# Altium PCB PCB1.PcbDoc
Units mm, origin at the board's own origin, x right, y up, seen from the top; angles counter-clockwise.
Board outline 100 x 100 mm, 2 copper layers (Top Layer, Bottom Layer); 32 components, 22 nets, 87 pads, 0 vias.
Unrouted connection lines stored in the file: 6.
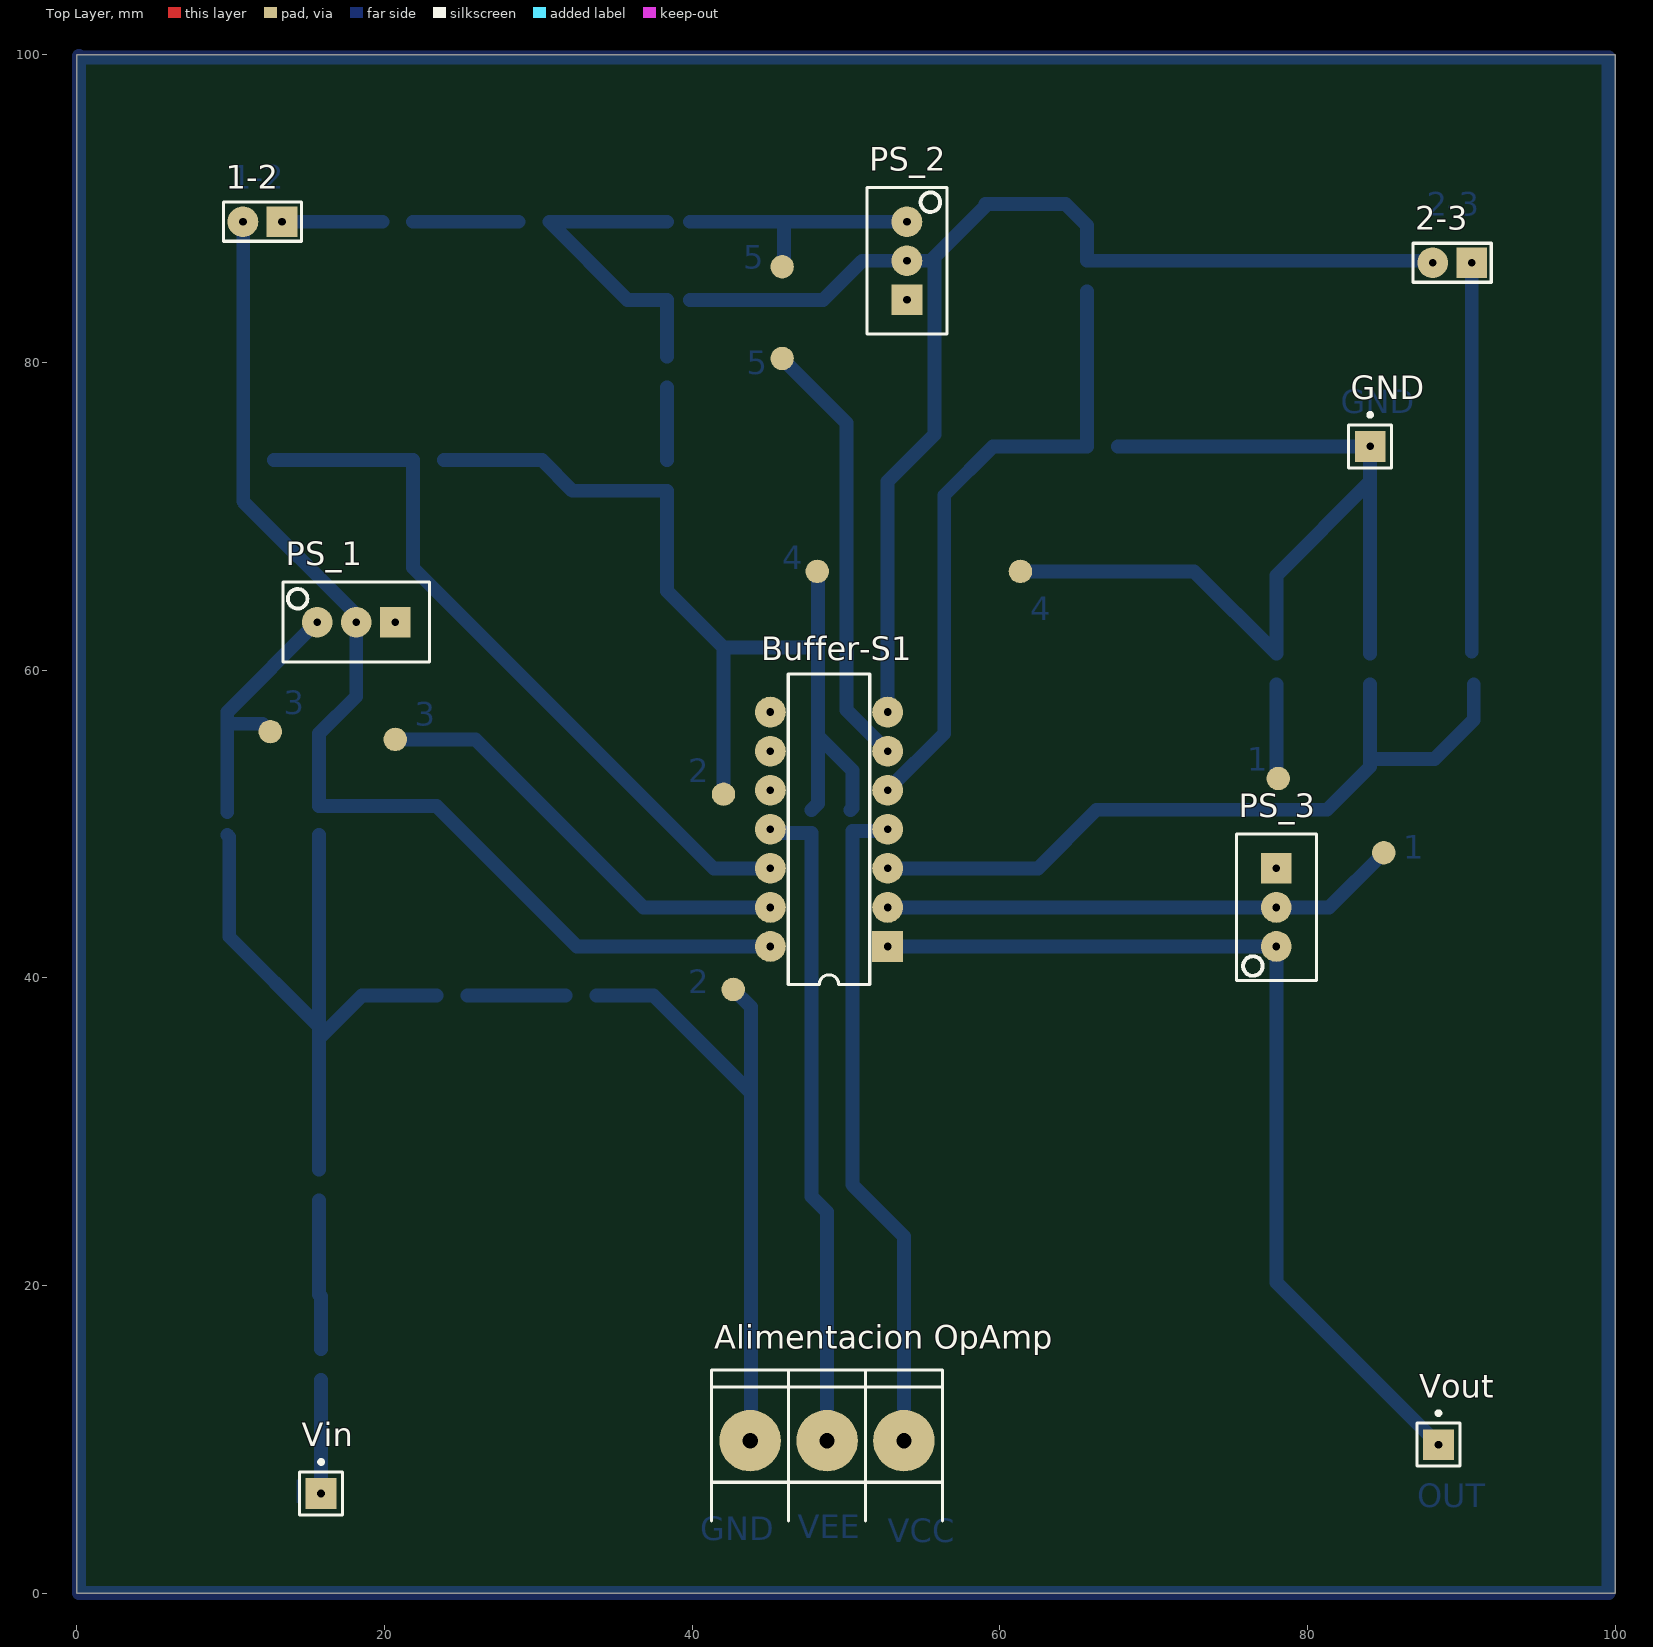
[diagram p0: Top Layer view]
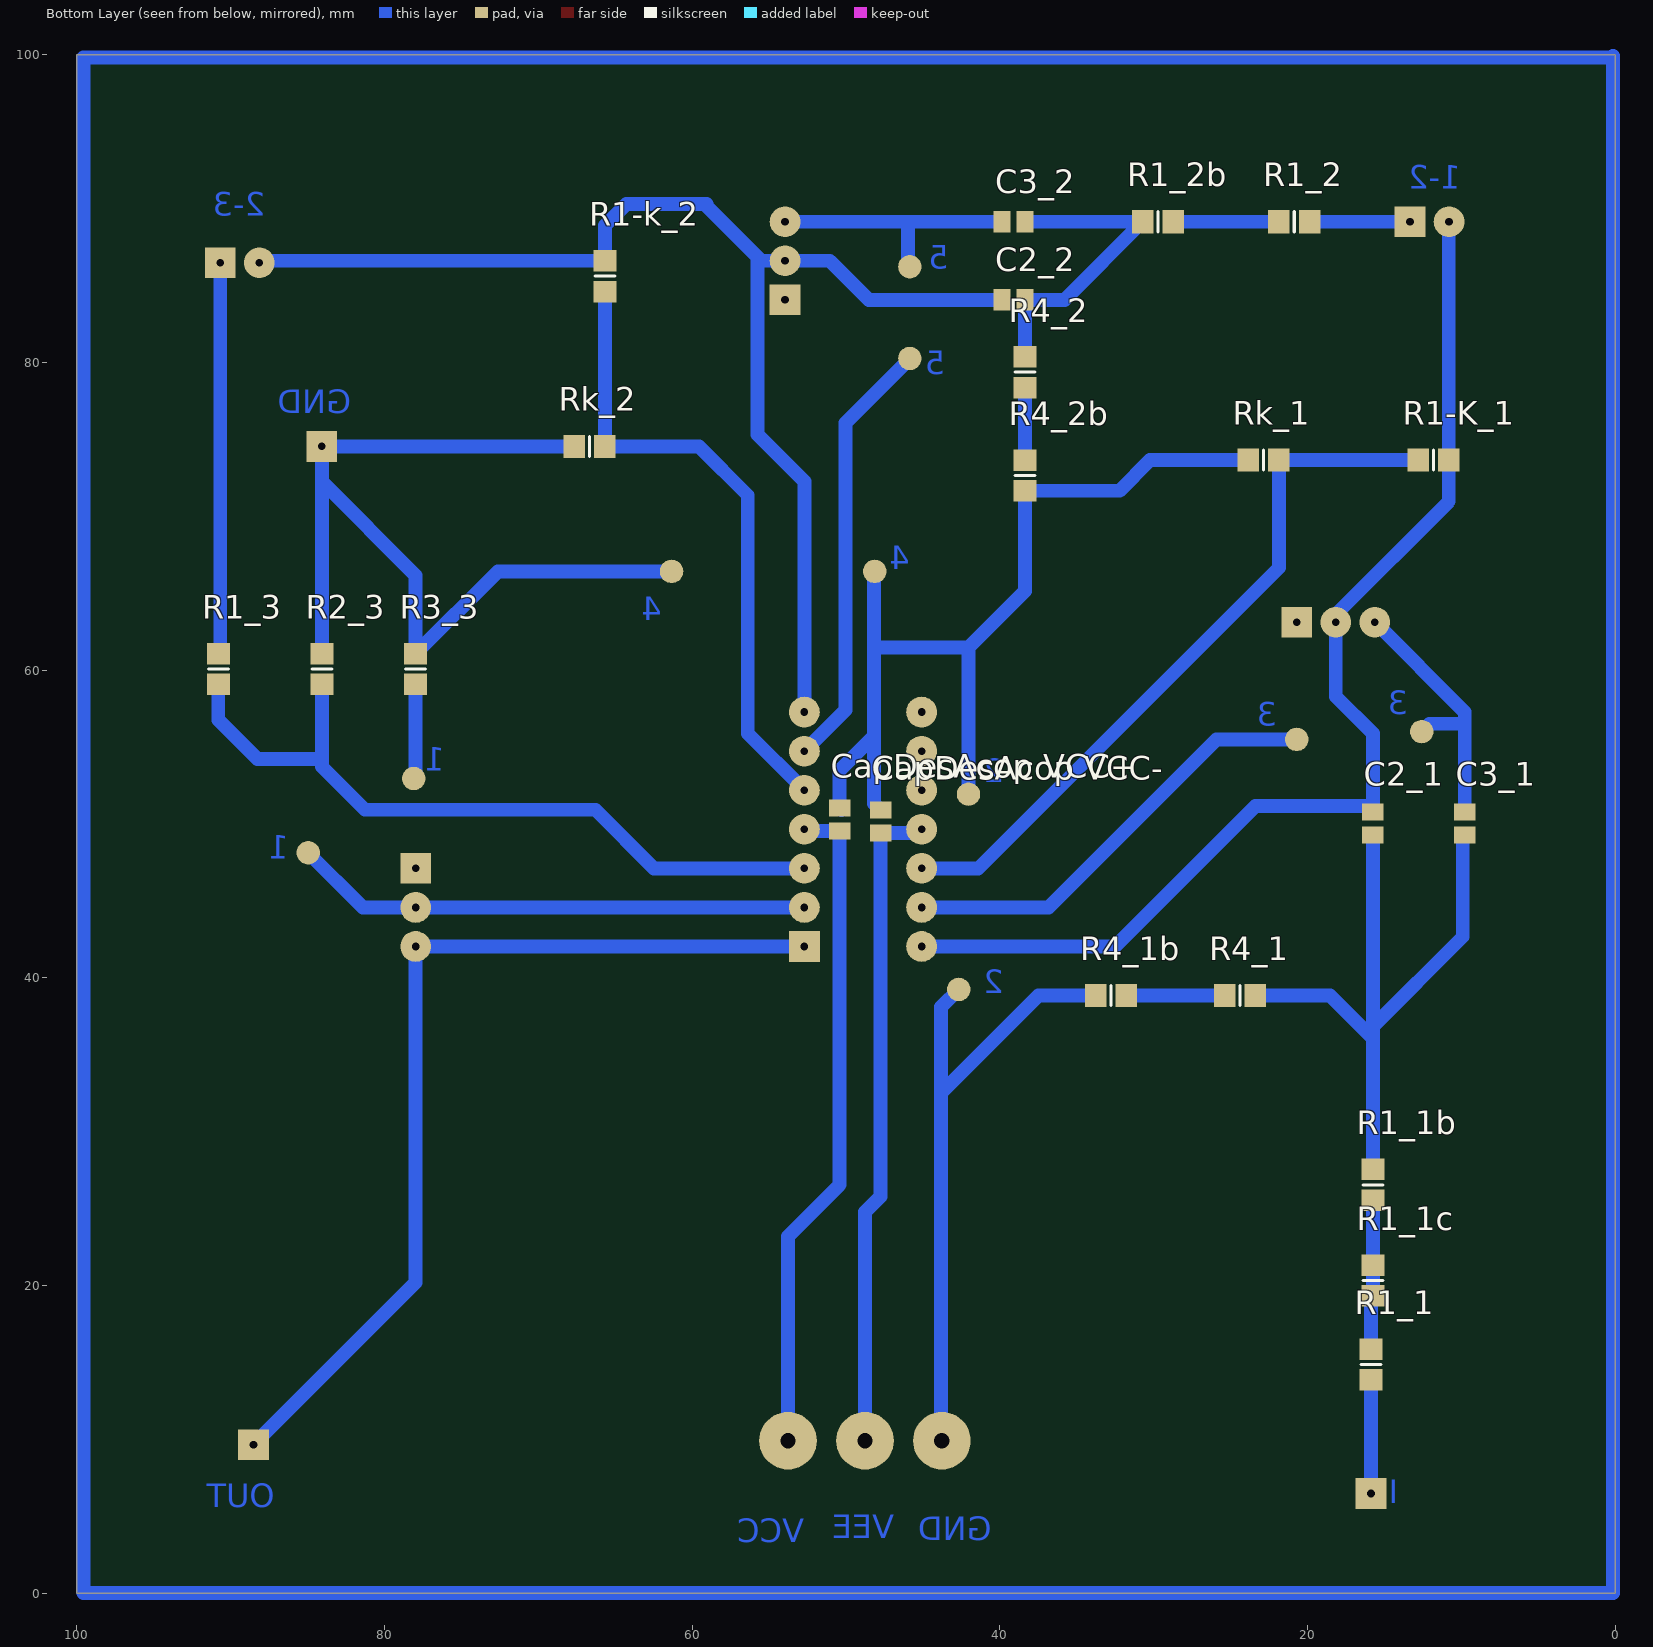
[diagram p1: Bottom Layer view, seen from below]
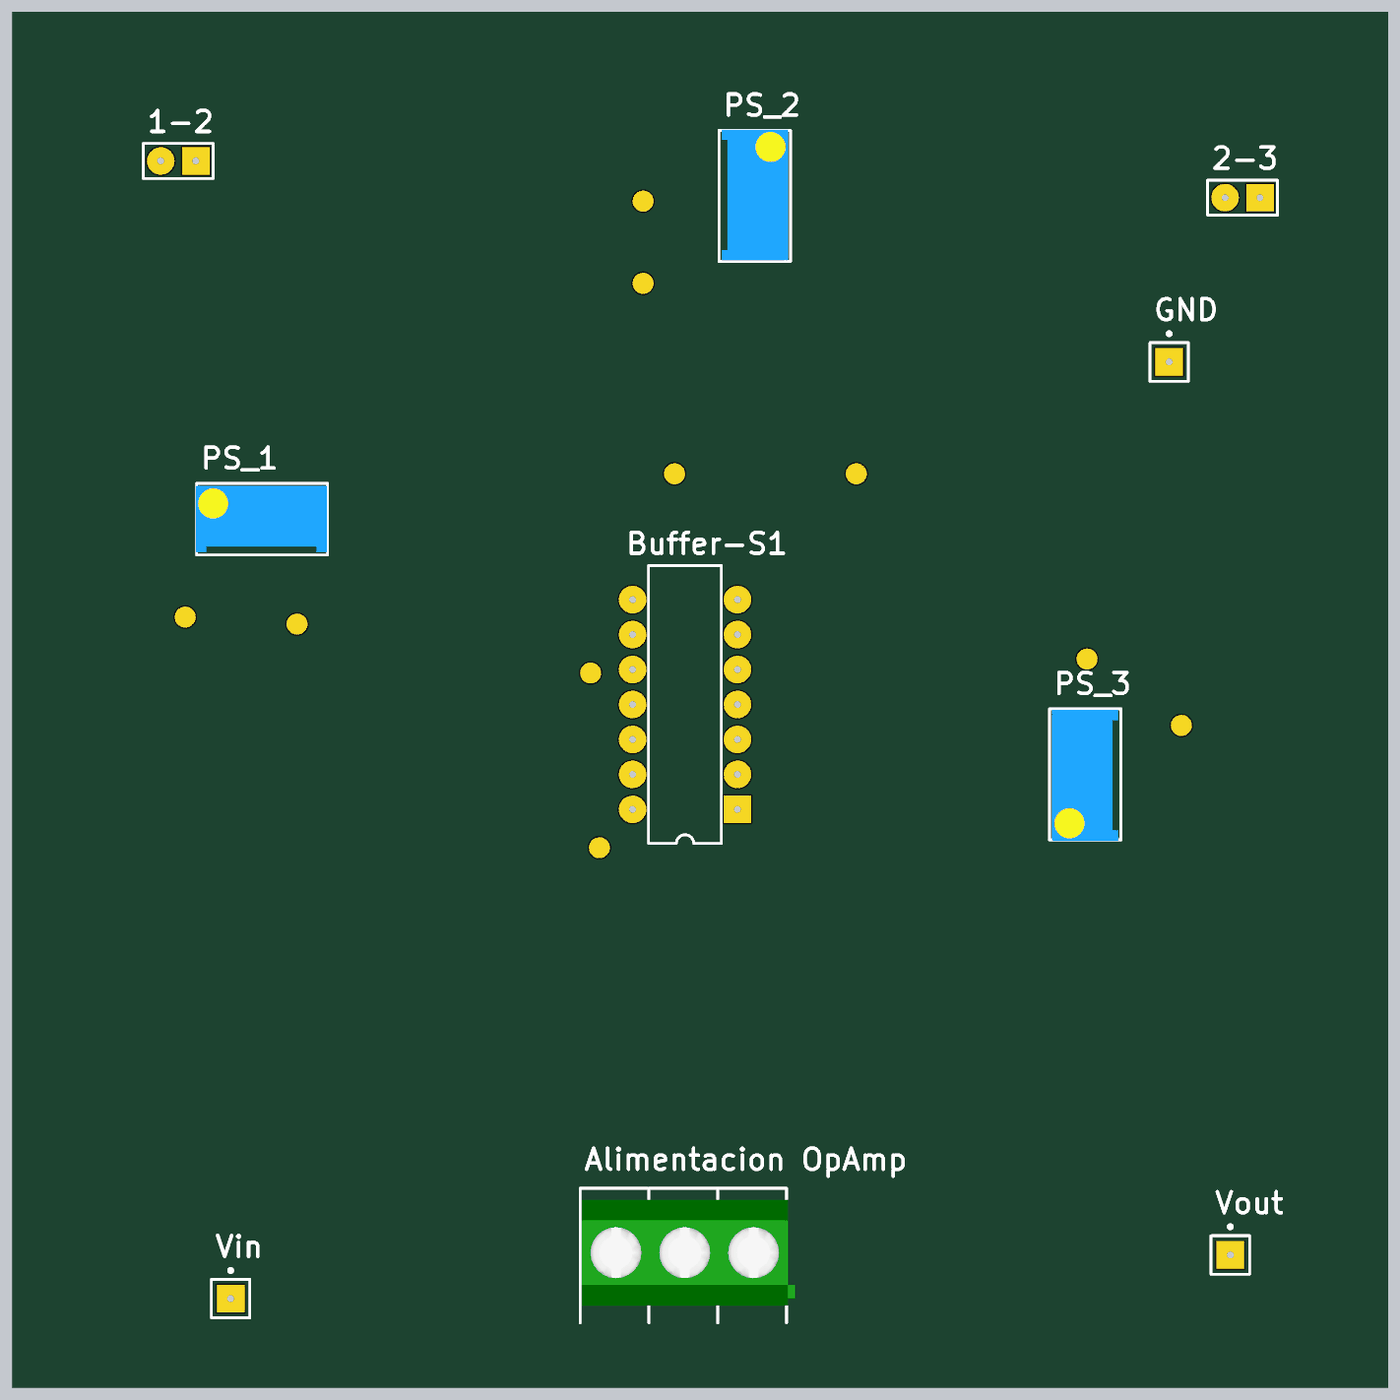
[diagram p2: 3D render of the assembled board from above, using the file's embedded part models]

## Layer stack, top to bottom
Top Solder: solder mask 0.0102, Solder Resist, Dk 3.5
Top Layer: signal copper 0.0356
Dielectric 1: dielectric 0.32, FR-4, Dk 4.8
Bottom Layer: signal copper 0.0356
Bottom Solder: solder mask 0.0102, Solder Resist, Dk 3.5

## Board outline
0,0 100,0 100,100 0,100 0,0

## Design rules (kind name [scope] priority, off if disabled: settings)
Clearance [All] p1: gap=0.254
PolygonConnect [All] p1: connectstyle=Relief reliefconductorwidth=0.254 reliefentries=4 polygonreliefangle="90 Angle" airgapwidth=0.254
RoutingVias [All] p1: holewidth=0.711 width=1.27 viastyle="Through Hole" minholewidth=0.711 minwidth=1.27 maxholewidth=0.711 maxwidth=1.27
SolderMaskExpansion [All] p1: expansion=0.102
UnpouredPolygon [All] p1: allowunpoured=FALSE
Width [All] p1: maxlimit=0.9 minlimit=0.75 preferedwidth=0.75
29 further rules are at their usual default settings.

## Components (designator, comment, footprint, x,y, rotation, side; value= is the part's Value field where it differs from the comment)
1-2 "Header 2" HDR1X2 13.335,89.154 r180 top
2-3 "Header 2" HDR1X2 90.678,86.487 r180 top
"Alimentacion OpAmp" "BORNERA 3" BORNERA3 48.768,9.906 r270 top
Buffer-S1 "TL084J" J014 48.895,49.657 r90 top
C2_1 "Cap Semi" C0805 15.748,50.038 r270 bottom
C2_2 "Cap Semi" C0805 39.116,84.074 r180 bottom
C3_1 "Cap Semi" C0805 9.779,50.038 r270 bottom
C3_2 "Cap Semi" C0805 39.116,89.154 r180 bottom
"CapDesAcop VCC+" "Cap Semi" C0805 50.419,50.292 r270 bottom
"CapDesAcop VCC-" "Cap Semi" C0805 47.752,50.165 r270 bottom
GND "Socket" PIN1 84.074,74.549 r0 top
PS_1 "PRESET 25K" "PRESET V" 18.161,63.119 r180 top
PS_2 "PRESET 25K" "PRESET V" 53.963,86.614 r90 top
PS_3 "PRESET 25K" "PRESET V" 77.978,44.577 r270 top
R1-K_1 "1k" 6-0805_M 11.811,73.66 r180 bottom
R1-k_2 "Res3" 6-0805_M 65.659,85.614 r90 bottom
R1_1 "Res3" 6-0805_M 15.875,14.859 r90 bottom
R1_1b "Res3" 6-0805_M 15.748,26.543 r90 bottom
R1_1c "Res3" 6-0805_M 15.748,20.32 r90 bottom
R1_2 "Res3" 6-0805_M 20.86,89.154 r0 bottom
R1_2b "Res3" 6-0805_M 29.718,89.154 r0 bottom
R1_3 "Res3" 6-0805_M 90.805,60.071 r270 bottom
R2_3 "Res3" 6-0805_M 84.074,60.071 r270 bottom
R3_3 "Res3" 6-0805_M 77.978,60.071 r270 bottom
R4_1 "Res3" 6-0805_M 24.384,38.846 r180 bottom
R4_1b "Res3" 6-0805_M 32.766,38.846 r180 bottom
R4_2 "Res3" 6-0805_M 38.366,79.375 r90 bottom
R4_2b "Res3" 6-0805_M 38.366,72.66 r90 bottom
Rk_1 "Res3" 6-0805_M 22.86,73.66 r180 bottom
Rk_2 "Res3" 6-0805_M 66.675,74.549 r180 bottom
Vin "Socket" PIN1 15.875,6.477 r0 top
Vout "Socket" PIN1 88.519,9.652 r0 top

## Footprints (in the part's own frame and the unit in brackets; to place one, negate y for a bottom-side part, rotate by r counter-clockwise, add the part's x,y. Pads: shape width x height; smd on the part's side, far side on the other; paste and mask are expansions set on the pad)
6-0805_M [mm] "Chip Resistor, Body 2.0x1.2mm, IPC Low Density"
  rect 1.4x1.5 smd: 1(-1,0) 2(1,0)
  silkscreen extent 0,-0.65 0,0.65, body extent -1.07,-0.7 1.07,0.7, height 0.7
BORNERA3 [mm] "Bornera con Tornillos 5mm separación"
  round 4 / inner round 3.75 / far side round 3.75 hole 1: 1(0,5) 2(0,0) 3(0,-5)
  silkscreen extent -4.6,-7.5 5.2,7.5, body extent -3.76,-7.39 3.94,8.11, height 10.05
C0805 [mm] "Chip Capacitor, Body 2.0x1.3mm, IPC High Density"
  rect 1.1x1.4 smd: 1(-0.75,0) 2(0.75,0)
  body extent -1.1,-0.72 1.1,0.72, height 1.4
HDR1X2 [mm] "Connector; Header; 2 Position"
  rect 2x2 hole 0.5: 1(0,0)
  round 2 hole 0.5: 2(2.54,0)
  silkscreen extent -1.27,-1.27 3.81,1.27
J014 [mm] "DIP; 14 Leads; Row Spacing 7.62 mm; Pitch 2.54 mm"
  rect 2x2 hole 0.5: 1(-7.62,-3.81)
  round 2 hole 0.5: 2(-5.08,-3.81) 3(-2.54,-3.81) 4(0,-3.81) 5(2.54,-3.81) 6(5.08,-3.81) 7(7.62,-3.81) 8(7.62,3.81) 9(5.08,3.81) 10(2.54,3.81) 11(0,3.81) 12(-2.54,3.81) 13(-5.08,3.81) 14(-7.62,3.81)
  silkscreen extent -10.1,-2.65 10.1,2.65
PIN1 [mm] "Connector; Plug"
  rect 2x2 hole 0.5: 1(0,0)
  silkscreen extent -1.4,-1.4 1.4,2.17
"PRESET V" [mm]
  rect 2x2 hole 0.5: 1(-2.54,0)
  round 2 hole 0.5: 2(0,0) 3(2.54,0)
  silkscreen extent -4.76,-2.6 4.76,2.6, body extent -4.7,-2.42 4.83,2.42, height 11.55

## Part data
1-2 2-3: "Header, 2-Pin"
Buffer-S1: "JFET-Input Operational Amplifier"
C2_1 C2_2 C3_1 C3_2 "CapDesAcop VCC+" "CapDesAcop VCC-": "Capacitor (Semiconductor SIM Model)"
PS_1 PS_2 PS_3: library part PRESET
R1-K_1: library part Res3, "Resistor"
R1-k_2 R1_1 R1_1b R1_1c R1_2 R1_2b R1_3 R2_3 R3_3 R4_1 R4_1b R4_2 R4_2b Rk_1 Rk_2: "Resistor"

## Free pads (board coordinates)
  round 1.524 all layers, no hole: 2(78.105,52.959) 3(84.963,48.133) 4(42.672,39.243) 5(42.037,51.943) 6(20.701,55.499) 7(12.573,56.007) 8(61.341,66.421) 9(48.133,66.421) 10(45.847,80.264) 11(45.847,86.233)

## Nets (pads, with @x,y where several pads share a name; then routed paths per layer and width w, separated by ;. In a path a pad name is that pad's centre, name@x,y a point inside that pad or via, vN(x,y) a via of type N, cw(c..) or ccw(c..) an arc to the next point about the centre after c; other vN are vias at no path point)
GND: "Alimentacion OpAmp.3" "CapDesAcop VCC+.1" "CapDesAcop VCC-.1" GND.1 pad.4 pad.5 pad.8 pad.9 R2_3.1 R3_3.1 R4_1b.1 R4_2b.1 Rk_1.1 Rk_2.1 | length 169.1
  Bottom Layer w0.9: Rk_1.1 30.226,73.66 32.226,71.66 R4_2b.1 38.366,65.139 42.037,61.468 ; R4_1b.1 37.481,38.846 43.815,32.512 ; pad.5 42.037,61.468 ; pad.4 43.815,38.1 43.815,32.512 ; 43.768,9.906 43.815,9.953 43.815,32.512 ; 47.752,50.915 48.177,51.34 48.177,55.709 ; pad.9@48.177,66.123 48.177,61.468 ; 50.292,50.915 50.419,51.042 50.419,53.467 48.177,55.709 ; pad.8@61.087,66.421 72.628,66.421 R3_3.1 77.978,66.167 84.074,72.263 ; Rk_2.1 GND.1 84.074,72.263 ; R2_3.1 84.074,72.263 ; 42.037,61.468 48.177,61.468 ; 48.177,55.709 48.177,61.468
Net1-2_1: 1-2.1 R1_2.1 | length 6.5
  Bottom Layer w0.9: 1-2.1 R1_2.1
Net1-2_2: 1-2.2 Buffer-S1.14 C2_1.1 PS_1.2 R1-K_1.2 | length 75.1
  Bottom Layer w0.9: 1-2.2 10.811,89.138 R1-K_1.2 10.811,70.977 18.161,63.627 PS_1.2 18.161,58.293 15.748,55.88 15.748,51.181 23.368,51.181 32.512,42.037 Buffer-S1.14
Net2-3_2: 2-3.2 Buffer-S1.7 C2_2.1 PS_2.2 R1-k_2.2 | length 84.5
  Bottom Layer w0.9: C2_2.1 48.514,84.074 51.054,86.614 PS_2.2 55.499,86.614 55.753,86.868 ; Buffer-S1.7 52.705,72.263 55.753,75.311 55.753,86.868 ; 2-3.2@88.011,86.614 R1-k_2.2 65.659,88.9 64.262,90.297 59.055,90.297 59.055,90.17 55.753,86.868
NetBuffer-S1_1: Buffer-S1.1 PS_3.3 Vout.1 | length 62
  Bottom Layer w0.9: Buffer-S1.1 PS_3.3 77.978,20.193 Vout.1
NetBuffer-S1_2: Buffer-S1.2 pad.2 pad.3 PS_3.2 R3_3.2 | length 39.6
  Bottom Layer w0.9: Buffer-S1.2 PS_3.2 81.407,44.577 pad.3 ; pad.2@77.978,53.213 R3_3.2
NetBuffer-S1_3: Buffer-S1.3 R1_3.2 R2_3.2 | length 49.5
  Bottom Layer w0.9: Buffer-S1.3 62.484,47.117 66.294,50.927 81.28,50.927 84.074,53.721 84.074,54.229 ; R2_3.2 84.074,54.229 ; R1_3.2 90.805,56.769 88.265,54.229 84.074,54.229
NetBuffer-S1_5: Buffer-S1.5 R1-k_2.1 Rk_2.2 | length 41.4
  Bottom Layer w0.9: Buffer-S1.5 56.388,55.88 56.388,71.374 59.563,74.549 Rk_2.2 ; Rk_2.2@65.659,74.565 R1-k_2.1
NetBuffer-S1_6: Buffer-S1.6 C3_2.1 pad.10 pad.11 PS_2.3 | length 45.4
  Bottom Layer w0.9: C3_2.1 45.974,89.154 ; pad.10 50.038,76.073 50.038,57.404 Buffer-S1.6 ; pad.11 45.974,86.36 45.974,89.154 ; PS_2.3 45.974,89.154
NetBuffer-S1_12: Buffer-S1.12 R1-K_1.1 Rk_1.2 | length 47.4
  Bottom Layer w0.9: R1-K_1.1 Rk_1.2 21.86,66.659 41.402,47.117 Buffer-S1.12
NetBuffer-S1_13: Buffer-S1.13 C3_1.1 pad.6 pad.7 PS_1.3 | length 46.7
  Bottom Layer w0.9: C3_1.1 9.779,56.515 ; pad.7 12.065,56.515 9.779,56.515 ; PS_1.3 9.779,57.277 9.779,56.515 ; pad.6 25.908,55.499 36.83,44.577 Buffer-S1.13
NetC2_1_2: C2_1.2 C3_1.2 R1_1b.2 R4_1.2 | length 45.5
  Bottom Layer w0.9: C3_1.2 9.906,49.161 9.906,42.672 15.748,36.83 ; R1_1b.2 15.748,36.068 ; C2_1.2 15.748,36.83 ; R4_1.2 18.526,38.846 15.748,36.068 ; 15.748,36.068 15.748,36.83
NetC2_2_2: C2_2.2 C3_2.2 R1_2b.2 R4_2.2 | length 21.1
  Bottom Layer w0.9: R4_2.2 C2_2.2 35.798,84.074 R1_2b.2 C3_2.2
NetR1_1_1: R1_1.1 Vin.1 | length 7.6
  Bottom Layer w0.9: Vin.1@15.875,6.223 R1_1.1
NetR1_1_2: R1_1.2 R1_1c.1 | length 9.6
  Bottom Layer w0.9: R1_1c.1@15.748,19.415 15.748,25.543 ; R1_1.2 R1_1c.1@15.875,19.288
NetR1_1b_1: R1_1b.1 R1_1c.2
NetR1_2_2: R1_2.2 R1_2b.1 | length 6.9
  Bottom Layer w0.9: R1_2.2 R1_2b.1
NetR4_1_1: R4_1.1 R4_1b.2 | length 6.4
  Bottom Layer w0.9: R4_1.1 R4_1b.2
NetR4_2_1: R4_2.1 R4_2b.2 | length 4.7
  Bottom Layer w0.9: R4_2b.2 R4_2.1
VCC+: "Alimentacion OpAmp.1" "CapDesAcop VCC+.2" Buffer-S1.4 | length 43.4
  Bottom Layer w0.9: Buffer-S1.4 52.59,49.542 50.419,49.542 50.419,26.543 53.768,23.194 53.768,9.906
VCC-: "Alimentacion OpAmp.2" "CapDesAcop VCC-.2" Buffer-S1.11 | length 42.7
  Bottom Layer w0.9: Buffer-S1.11 45.327,49.415 47.752,49.415 47.752,25.781 48.768,24.765 48.768,9.906
VX: 2-3.1 R1_3.1 | length 25.3
  Bottom Layer w0.9: R1_3.1@90.678,61.198 2-3.1
pads on no net: Buffer-S1.8 Buffer-S1.9 Buffer-S1.10 PS_1.1 PS_2.1 PS_3.1
copper on no net: | length 398.7
  Bottom Layer w0.9: 0.127,99.822 99.568,99.822 99.568,0 0.127,0 0.127,99.949

## Other copper
Bottom Layer:
  text "1-2" at 10.033,91.313 h1.52
  text "2-3" at 87.757,89.535 h1.52
  text "5" at 43.307,86.106 h1.52
  text "5" at 43.561,79.248 h1.52
  text "GND" at 82.169,76.708 h1.52
  text "4" at 45.847,66.548 h1.52
  text "4" at 61.976,63.246 h1.52
  text "3" at 13.462,57.15 h1.52
  text "3" at 21.971,56.388 h1.52
  text "1" at 76.073,53.467 h1.52
  text "2" at 39.751,52.705 h1.52
  text "1" at 86.233,47.752 h1.52
  text "2" at 39.751,38.989 h1.52
  text "IN" at 14.097,5.842 h1.52
  text "OUT" at 87.122,5.588 h1.52
  text "VEE" at 46.863,3.556 h1.52
  text "GND" at 40.513,3.429 h1.52
  text "VCC" at 52.705,3.302 h1.52